# EAGLE board i2c-board (EAGLE 7.6.0)
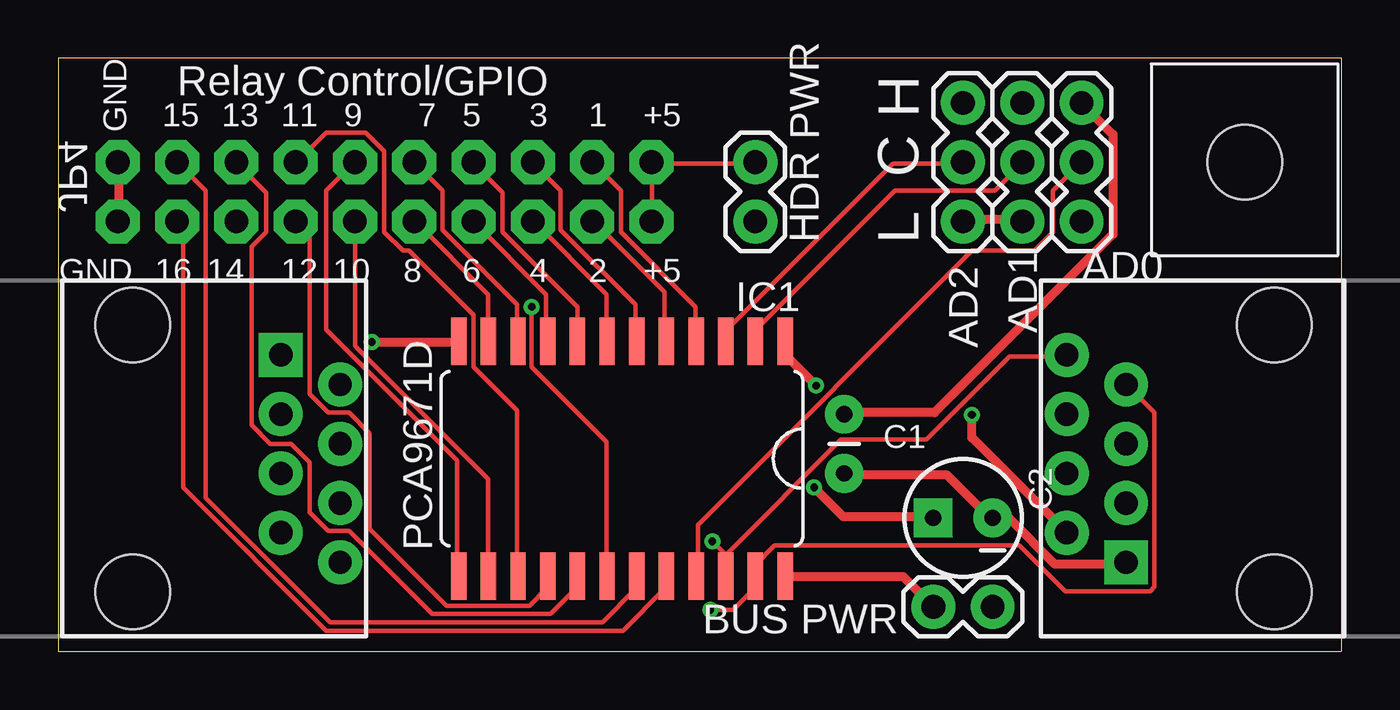
[diagram p0: board, top side]
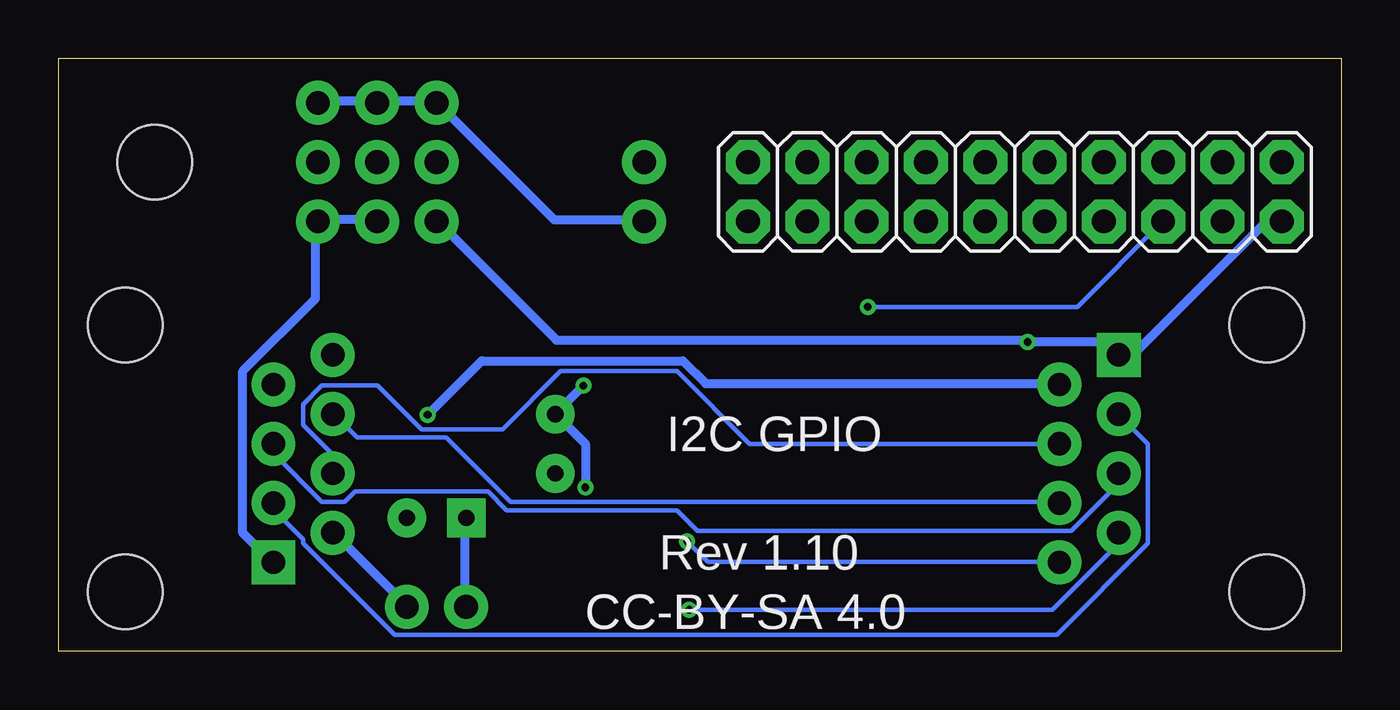
[diagram p1: board, bottom side, seen from below]

Size 54.93 x 25.4 mm. Coordinates in mm from the lower left corner, seen from the top.
Outline: 0,0 54.93,0 54.93,25.4 0,25.4 0,0
Copper layers (1*16): Top 0.0356mm / dielectric 1.5011mm / Bottom 0.0356mm
Design rules "LaenPCBOrder": minimum track width 6mil, minimum drill 13mil, track to track 6mil, track to pad 6mil, pad to pad 6mil, via to via 6mil, smd to smd 6mil, copper to edge 15mil, drill to drill 6mil, minimum pad ring 7mil, minimum via ring 7mil, stop-mask expansion 3mil, vias tented up to drill 0mil, thermal gap 10mil
Net classes: 0 default: width 0.203 mm; 1 power: width 0.381 mm

## Footprints (pad centres in the part's own frame; a part is rotated, then mirrored left to right if it is on the bottom)
CAP-PTH-SMALL = drill 0.7 pad 1.651: 1 0,0; 2 2.54,0
CPOL-RADIAL-10UF-25V = drill 0.7 pad 1.651 square: 1 1.27,0 | drill 0.7 pad 1.651: 2 -1.27,0
SOIC24 = smd 0.66 x 2.032: 1 -6.985,-5.029; 2 -5.715,-5.029; 3 -4.445,-5.029; 4 -3.175,-5.029; 5 -1.905,-5.029; 6 -0.635,-5.029; 7 0.635,-5.029; 8 1.905,-5.029; 9 3.175,-5.029; 10 4.445,-5.029; 11 5.715,-5.029; 12 6.985,-5.029; 13 6.985,5.029; 14 5.715,5.029; 15 4.445,5.029; 16 3.175,5.029; 17 1.905,5.029; 18 0.635,5.029; 19 -0.635,5.029; 20 -1.905,5.029; 21 -3.175,5.029; 22 -4.445,5.029; 23 -5.715,5.029; 24 -6.985,5.029
1X03 = drill 1.016 pad 1.88: 1 0,0; 2 2.54,0; 3 5.08,0
2X10 = drill 1.016 pad 1.88 octagon: 1 -11.43,-1.27; 2 -11.43,1.27; 3 -8.89,-1.27; 4 -8.89,1.27; 5 -6.35,-1.27; 6 -6.35,1.27; 7 -3.81,-1.27; 8 -3.81,1.27; 9 -1.27,-1.27; 10 -1.27,1.27; 11 1.27,-1.27; 12 1.27,1.27; 13 3.81,-1.27; 14 3.81,1.27; 15 6.35,-1.27; 16 6.35,1.27; 17 8.89,-1.27; 18 8.89,1.27; 19 11.43,-1.27; 20 11.43,1.27
RJ45-8 = drill 1 pad 1.88 square: 1 -4.445,6.35 | drill 1 pad 1.88: 2 -3.175,8.89; 3 -1.905,6.35; 4 -0.635,8.89; 5 0.635,6.35; 6 1.905,8.89; 7 3.175,6.35; 8 4.445,8.89 | hole 3.2: -5.715,0; 5.715,0
1X02 = drill 1.016 pad 1.88: 1 0,0; 2 2.54,0
3.2-MOUNT = hole 3.2: 0,0

## Placement (x,y rotation side)
C1  .1uf  [CAP-PTH-SMALL]  33.66,7.62 90 top
C2  10uf  [CPOL-RADIAL-10UF-25V]  38.73,5.71 180 top
IC1  PCA9671D  [SOIC24]  24.13,8.26 180 top
JP1  AD0  [1X03]  43.81,23.5 270 top
JP2  AD1  [1X03]  41.27,23.5 270 top
JP3  AD2  [1X03]  38.73,23.5 270 top
JP4  Relay Control/GPIO  [2X10]  13.97,19.68 180 bottom
JP5  RJ45-8PTH  [RJ45-8]  52.07,8.26 90 top
JP6  RJ45-8PTH  [RJ45-8]  3.17,8.26 270 top
JP8  HDR PWR  [1X02]  29.84,18.41 90 top
JP9  BUS PWR  [1X02]  40.01,1.91 180 top
MT1  3.2-MOUNT  [3.2-MOUNT]  50.8,20.95 0 top

## Library data of the parts
C1 C2 = SparkFun-Capacitors
IC1 MT1 = PJS
JP1-JP6 JP8 JP9 = SparkFun-Connectors

## Nets
+5V [power]: C1.2 C2.1 IC1.1 IC1.24 JP1.1 JP2.1 JP3.1 JP8.1 JP9.2
A0: JP5.3 JP6.3
A1: JP5.4 JP6.4
A2: JP5.5 JP6.5
A3: JP5.6 JP6.6
A4-SDA: IC1.23 JP5.7 JP6.7
A5-SCL: IC1.22 JP5.8 JP6.8
BUSS_VCC [power]: JP5.2 JP6.2 JP9.1
GND [power]: C1.1 C2.2 IC1.12 JP1.3 JP2.3 JP3.3 JP4.1 JP4.2 JP5.1 JP6.1
N$1: JP4.19 JP4.20 JP8.2
N$10: IC1.21 JP1.2
N$11: IC1.2 JP2.2
N$12: IC1.3 JP3.2
RL1: IC1.4 JP4.17
RL2: IC1.5 JP4.18
RL3: IC1.6 JP4.15
RL4: IC1.7 JP4.16
RL5: IC1.8 JP4.13
RL6: IC1.9 JP4.14
RL7: IC1.10 JP4.11
RL8: IC1.11 JP4.12
RL9: IC1.13 JP4.9
RL10: IC1.14 JP4.10
RL11: IC1.15 JP4.7
RL12: IC1.16 JP4.8
RL13: IC1.17 JP4.5
RL14: IC1.18 JP4.6
RL15: IC1.19 JP4.3
RL16: IC1.20 JP4.4

## Tracks (layer width: path | path; a pad name or v marks a point on that pad's centre or on a via)
+5V  (via drill 0.33)
  Top 0.381: IC1.24 31.11,3.2 36.18,3.2 37.43,1.96 JP9.2 | IC1.1 31.11,12.71 v32.45,11.38 | C1.2 33.69,10.22 37.52,10.22 45.16,17.87 45.16,22.14 43.83,23.47 JP1.1 | v32.36,7.02 33.6,5.78 37.43,5.78 C2.1
  Bottom 0.381: C2.1 37.52,5.69 37.52,1.96 JP9.2 | v32.45,11.38 33.6,10.22 C1.2 33.52,10.05 32.36,8.89 v32.36,7.02 | JP8.1 29.87,18.49 33.69,18.49 38.67,23.47 JP3.1 38.85,23.56 41.25,23.56 JP2.1 41.43,23.56 43.74,23.56 JP1.1
A0
  Bottom 0.203: JP5.3 45.7,6.31 45.7,6.04 44.45,4.8 44.45,4.62 40.54,0.71 12.18,0.71 8.27,4.62 8.27,8.89 9.51,10.13 JP6.3
A1
  Bottom 0.203: JP6.4 25.34,8.89 28.45,12 33.43,12 35.92,9.51 39.38,9.51 41.25,11.38 43.65,11.38 44.45,10.58 44.45,9.69 43.2,8.45 43.2,7.64 JP5.4
A2
  Bottom 0.203: JP6.5 9.6,7.56 9.6,7.11 11.56,5.16 27.56,5.16 28.45,6.04 35.74,6.04 36.54,6.84 42.23,6.84 42.67,6.4 43.65,6.4 45.7,8.45 45.7,8.89 JP5.5
A3
  Bottom 0.203: JP6.6 12.09,6.4 35.56,6.4 38.32,9.16 42.14,9.16 43.12,10.13 JP5.6
A4-SDA  (via drill 0.33)
  Top 0.203: JP5.7 45.78,11.38 46.94,10.22 46.94,2.76 46.76,2.58 43.12,2.58 41.16,4.53 30.67,4.53 29.87,3.73 29.87,3.29 IC1.23 29.78,3.2 29.78,2.67 28.89,1.78 v27.91,1.78
  Bottom 0.203: v27.91,1.78 12.36,1.78 9.6,4.53 9.6,5.07 JP6.7
A5-SCL  (via drill 0.33)
  Top 0.203: JP5.8 43.12,12.62 40.72,12.62 37.16,9.07 33.52,9.07 28.63,4.18 28.63,3.29 IC1.22 28.54,4.18 v28,4.71
  Bottom 0.203: v28,4.71 27.11,3.82 12.09,3.82 JP6.8
BUSS_VCC  (via drill 0.33)
  Top 0.381: v39.12,10.13 39.12,9.16 43.12,5.16 JP5.2
  Bottom 0.381: JP9.1 40.01,1.96 43.12,5.07 JP5.2 | v39.12,10.13 36.8,12.45 28.18,12.45 27.2,11.47 12.09,11.47 JP6.2
GND  (via drill 0.33)
  Top 0.381: JP4.2 2.58,18.49 2.58,20.89 JP4.1 | v13.42,13.25 17.07,13.25 IC1.12 | JP3.3 38.76,18.49 41.25,18.49 JP2.3 | JP5.1 45.7,3.73 42.67,3.73 40.72,5.69 40.01,5.69 C2.2 39.83,5.78 38.05,7.56 33.69,7.56 C1.1
  Bottom 0.381: JP4.2 2.58,18.4 3.2,18.4 8.89,12.71 9.34,12.71 JP6.1 9.6,12.71 10.13,13.25 v13.42,13.25 13.6,13.34 33.6,13.34 38.67,18.4 JP3.3 | JP2.3 41.34,18.49 43.74,18.49 JP1.3 43.92,18.31 43.92,15.11 47.03,12 47.03,5.07 45.78,3.82 JP5.1
N$1
  Top 0.203: JP4.20 25.43,18.49 25.43,20.89 JP4.19 25.51,20.89 29.78,20.89 JP8.2
N$10
  Top 0.203: IC1.21 27.38,3.29 27.38,5.42 39.12,17.16 41.78,17.16 42.58,17.96 42.58,19.74 43.74,20.89 JP1.2
N$11
  Top 0.203: IC1.2 29.87,13.34 29.87,13.78 35.83,19.74 40.09,19.74 41.25,20.89 JP2.2
N$12
  Top 0.203: IC1.3 28.63,13.34 28.63,13.78 35.74,20.89 38.67,20.89 JP3.2
RL1
  Top 0.203: IC1.4 27.29,13.34 27.29,14.76 24.09,17.96 24.09,19.74 22.94,20.89 JP4.17
RL2
  Top 0.203: IC1.5 25.96,13.34 25.96,15.38 22.94,18.4 JP4.18
RL3
  Top 0.203: IC1.6 24.71,13.34 24.71,14.85 21.51,18.05 21.51,19.74 20.36,20.89 JP4.15
RL4
  Top 0.203: IC1.7 23.47,13.34 23.47,15.29 20.36,18.4 JP4.16
RL5
  Top 0.203: IC1.8 22.23,14.76 19.02,17.96 19.02,19.65 17.78,20.89 JP4.13
RL6
  Top 0.203: IC1.9 20.89,13.34 20.89,15.29 JP4.14
RL7
  Top 0.203: IC1.10 19.65,13.34 19.65,14.85 16.45,18.05 16.45,19.74 15.29,20.89 JP4.11
RL8
  Top 0.203: IC1.11 18.4,13.34 18.4,15.29 15.29,18.4 JP4.12
RL9
  Top 0.203: IC1.13 17.07,3.29 17.07,8.18 11.47,13.78 11.47,19.74 12.62,20.89 JP4.9
RL10
  Top 0.203: IC1.14 18.4,3.29 18.4,7.38 12.71,13.07 12.71,18.4 JP4.10
RL11
  Top 0.203: IC1.15 19.65,3.29 19.65,10.31 17.78,12.18 17.78,14.4 15.02,17.16 14.76,17.16 13.96,17.96 13.96,21.43 13.16,22.23 11.47,22.23 10.22,20.98 JP4.7
RL12
  Top 0.203: IC1.16 20.89,3.2 20.89,2.67 20.18,1.96 16.62,1.96 13.34,5.25 13.34,9.34 12.45,10.22 11.56,10.22 10.76,11.02 10.76,17.87 10.22,18.4 JP4.8
RL13
  Top 0.203: IC1.17 22.23,2.76 21.07,1.6 16,1.6 12.45,5.16 11.56,5.16 10.76,5.96 10.76,8.09 9.96,8.89 9.07,8.89 8.27,9.69 8.27,17.34 8.89,17.96 8.89,19.65 7.64,20.89 JP4.5
RL14  (via drill 0.33)
  Top 0.203: v20.27,14.76 20.27,12.18 23.47,8.98 23.47,3.29 IC1.18
  Bottom 0.203: v20.27,14.76 11.29,14.76 7.64,18.4 JP4.6
RL15
  Top 0.203: IC1.19 24.71,3.2 24.71,2.67 23.29,1.25 11.65,1.25 6.31,6.58 6.31,19.74 5.16,20.89 JP4.3
RL16
  Top 0.203: IC1.20 25.96,3.2 25.96,2.67 24.18,0.89 11.47,0.89 5.33,7.02 5.33,18.22 5.16,18.4 JP4.4

## Text on the board
tNames: GND | 15 | 13 | 11 | 9 | 7 | 5 | 3 | 1 | +5 | H | C | GND | 16 | 14 | 12 | 10 | 8 | 6 | 4 | 2 | +5 | L
bNames: I2C GPIO | Rev 1.10 | CC-BY-SA 4.0